# EAGLE board led_smd (EAGLE 9.6.2)
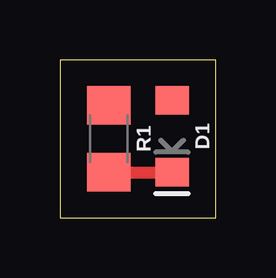
[diagram p0: board, top side]

Size 6.5 x 6.6 mm. Coordinates in mm from the lower left corner, seen from the top.
Outline: 0,0 6.5,0 6.5,6.6 0,6.6 0,0
Copper layers (1*16): Top 0.035mm / dielectric 1.5mm / Bottom 0.035mm
Design rules "default": minimum track width 6mil, minimum drill 0.35mm, track to track 6mil, track to pad 6mil, pad to pad 6mil, via to via 6mil, smd to smd 6mil, copper to edge 40mil, drill to drill 6mil, minimum pad ring 10mil, minimum via ring 8mil, stop-mask expansion 4mil, vias tented up to drill 0mil, thermal gap 10mil
Net classes: 0 default: width 0.178 mm; 1 vcc: width 0.203 mm

## Footprints (pad centres in the part's own frame; a part is rotated, then mirrored left to right if it is on the bottom)
LED-1206 = smd 1.2 x 1.4: A -1.5,0; C 1.5,0
1206 = smd 1.6 x 1.8: 1 -1.4,0; 2 1.4,0

## Placement (x,y rotation side)
D1  [LED-1206]  4.68,3.41 270 top
R1  330  [1206]  2.04,3.31 270 top

## Library data of the parts
D1 = SparkFun-LED
R1 = SparkFun-Resistors

## Nets
#GPIO_3.3V: D1.A
GND: R1.1
N$1: D1.C R1.2

## Tracks (layer width: path | path; a pad name or v marks a point on that pad's centre or on a via)
N$1
  Top 0.508: R1.2 D1.C